# Altium PCB Pedal_Power.PcbDoc
Units mm, origin at the board's own origin, x right, y up, seen from the top; angles counter-clockwise.
Board outline 100 x 88 mm, 2 copper layers (Top Layer, Bottom Layer); 6 components, 2 nets, 26 pads, 0 vias.
Unrouted connection lines stored in the file: 23.
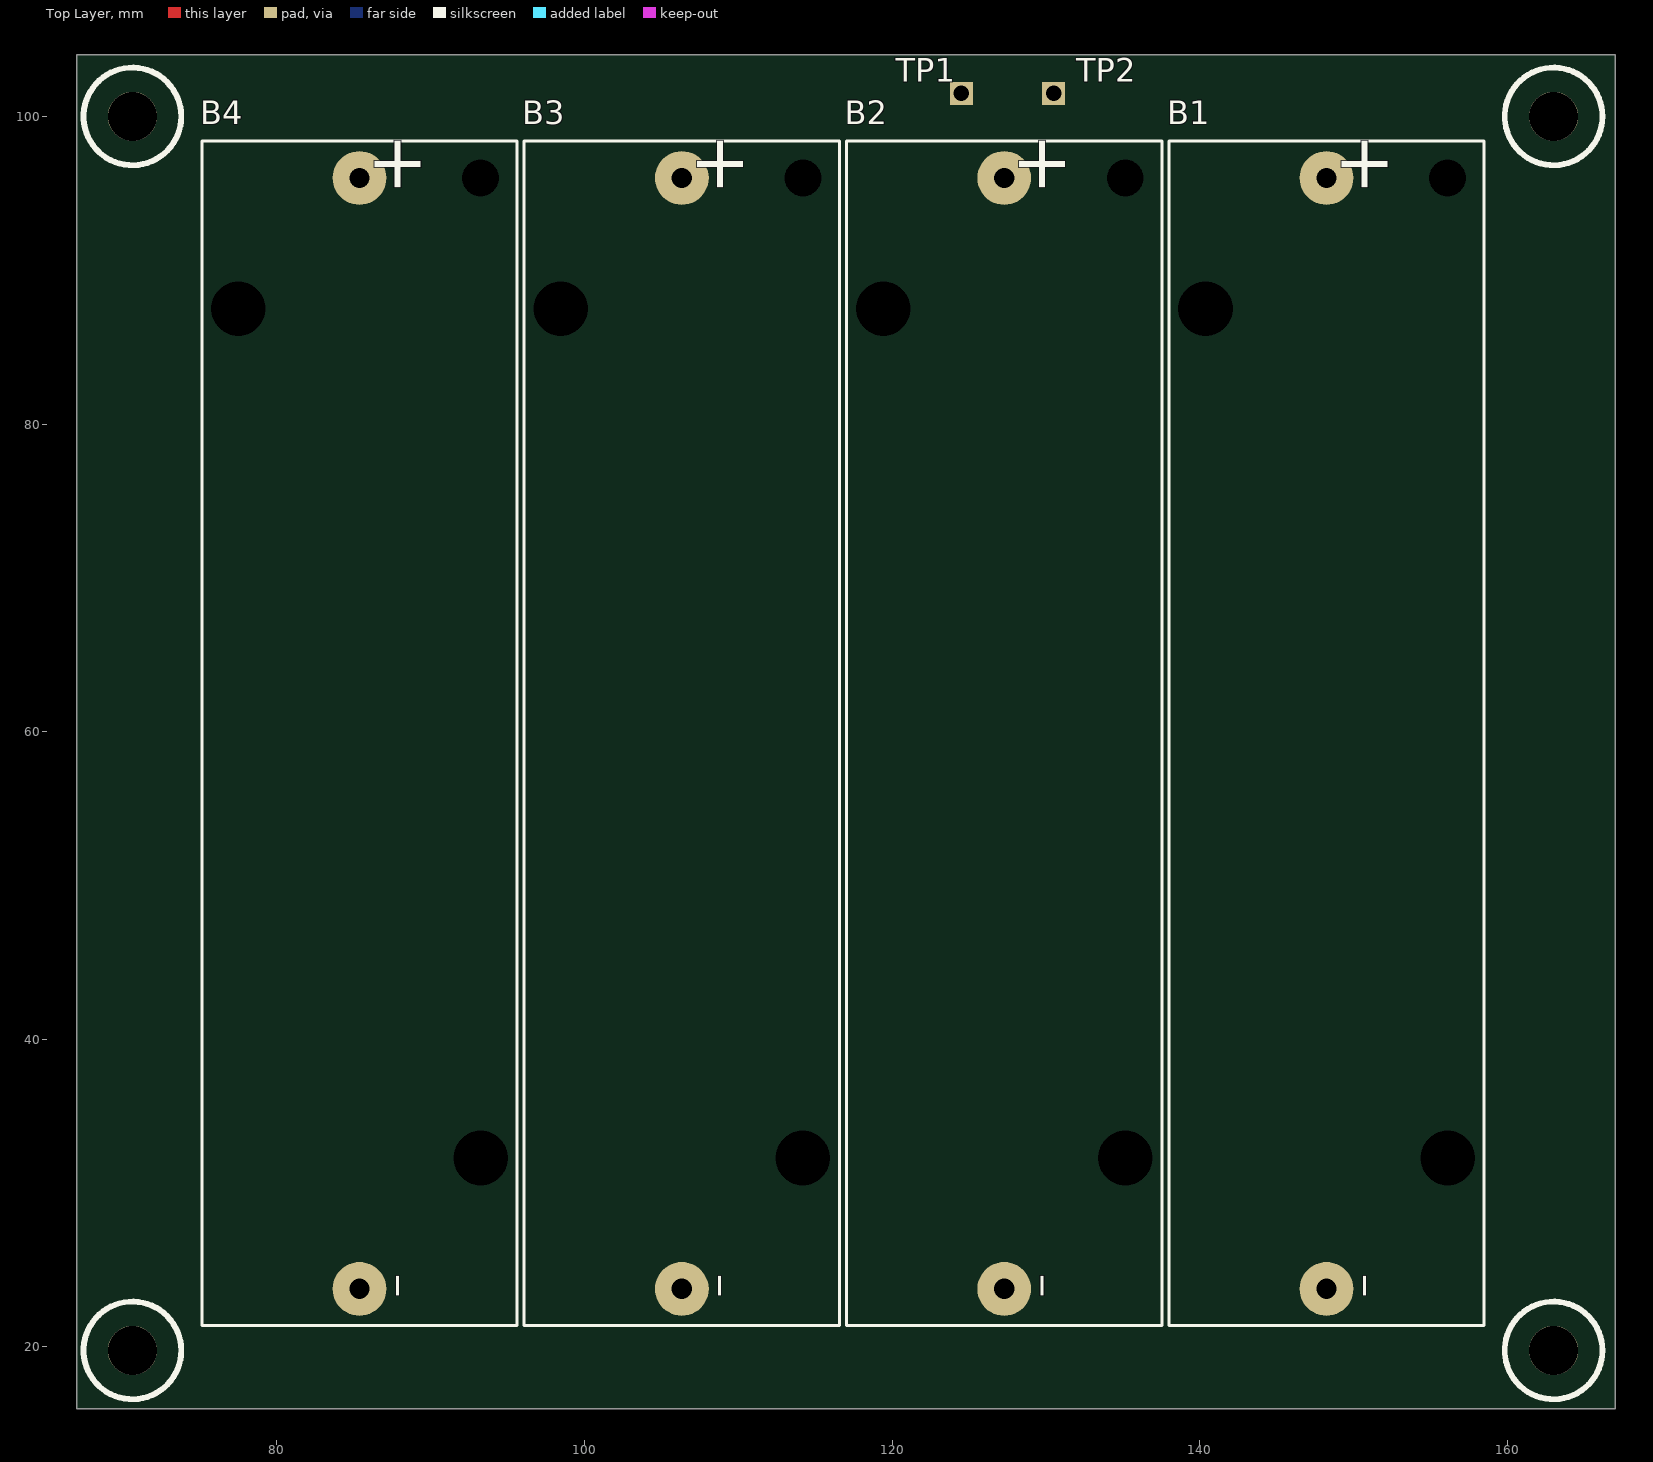
[diagram p0: Top Layer view]
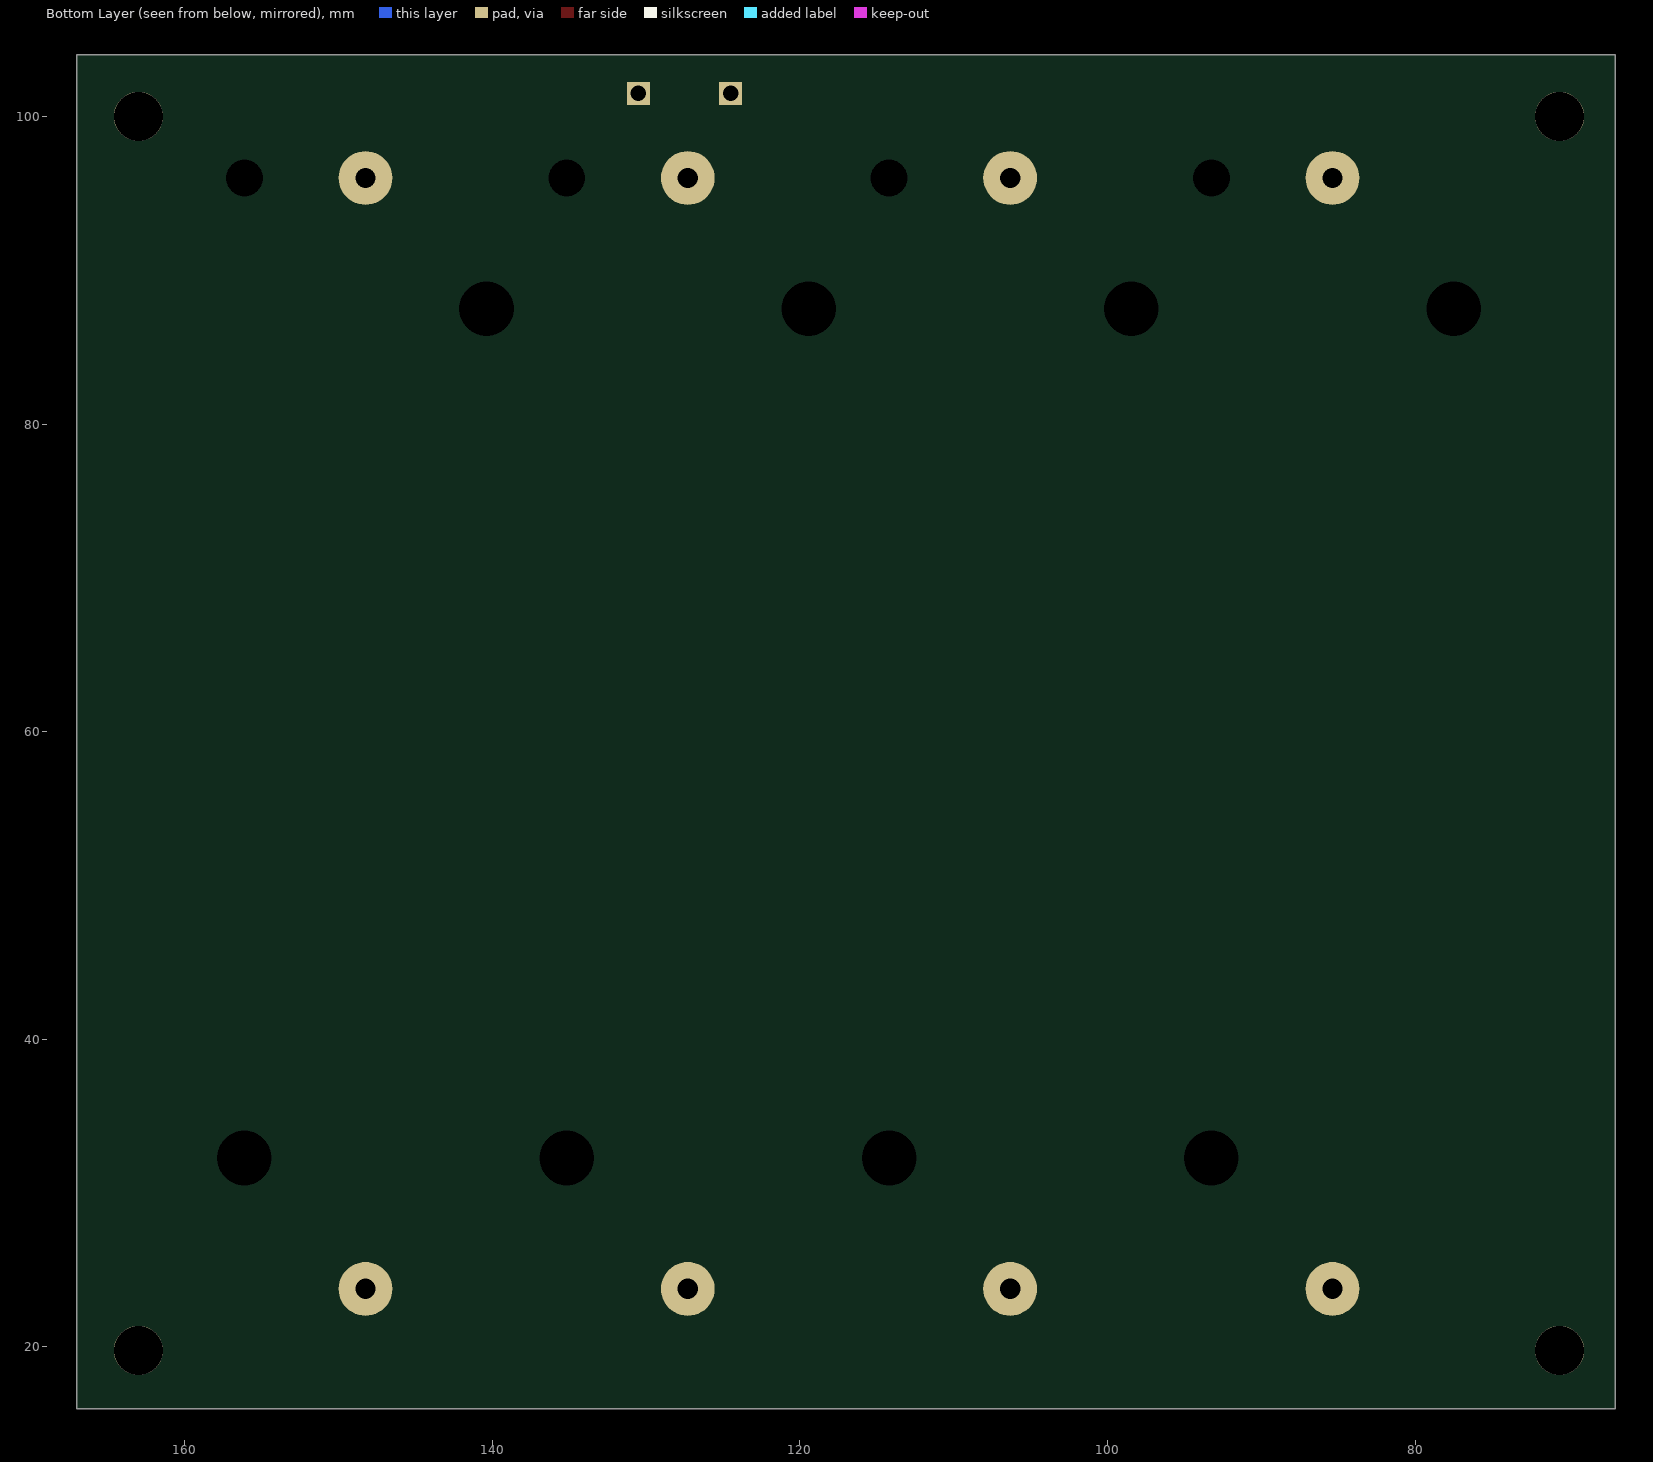
[diagram p1: Bottom Layer view, seen from below]

## Layer stack, top to bottom
Top Solder: solder mask 0.0102, Solder Resist, Dk 3.5
Top Layer: signal copper 0.0356
Dielectric 1: dielectric 0.32, FR-4, Dk 4.8
Bottom Layer: signal copper 0.0356
Bottom Solder: solder mask 0.0102, Solder Resist, Dk 3.5

## Board outline
67,16 67,104 167,104 167,16

## Design rules (kind name [scope] priority, off if disabled: settings)
Clearance [All] p1: gap=0.203 ignorepadtopadclearanceinfootprint=FALSE
PolygonConnect PolygonConnect_5 [All vs IsNamedPolygon('NONET_L01_P-001')] p1: thpad.connectstyle=Relief thpad.reliefconductorwidth=0.254 thpad.reliefentries=4 thpad.polygonreliefangle="90 Angle" thpad.airgapwidth=0.254 smdpad.connectstyle=Relief smdpad.reliefconductorwidth=0.254 smdpad.reliefentries=4 smdpad.polygonreliefangle="90 Angle" smdpad.airgapwidth=0.254 via.connectstyle=Direct via.reliefconductorwidth=0.254 via.reliefentries=4 via.polygonreliefangle="90 Angle" via.airgapwidth=0.254
PolygonConnect PolygonConnect_4 [All vs IsNamedPolygon('NONET_L01_P-001')] p2: thpad.connectstyle=Relief thpad.reliefconductorwidth=0.254 thpad.reliefentries=4 thpad.polygonreliefangle="90 Angle" thpad.airgapwidth=0.254 smdpad.connectstyle=Relief smdpad.reliefconductorwidth=0.254 smdpad.reliefentries=4 smdpad.polygonreliefangle="90 Angle" smdpad.airgapwidth=0.254 via.connectstyle=Direct via.reliefconductorwidth=0.254 via.reliefentries=4 via.polygonreliefangle="90 Angle" via.airgapwidth=0.254
PolygonConnect PolygonConnect_3 [All vs IsNamedPolygon('+5V_L01_P002')] p3: thpad.connectstyle=Relief thpad.reliefconductorwidth=0.254 thpad.reliefentries=4 thpad.polygonreliefangle="90 Angle" thpad.airgapwidth=0.254 smdpad.connectstyle=Relief smdpad.reliefconductorwidth=0.254 smdpad.reliefentries=4 smdpad.polygonreliefangle="90 Angle" smdpad.airgapwidth=0.254 via.connectstyle=Direct via.reliefconductorwidth=0.254 via.reliefentries=4 via.polygonreliefangle="90 Angle" via.airgapwidth=0.254
PolygonConnect PolygonConnect_2 [All vs IsNamedPolygon('NONET_L01_P-001')] p4: thpad.connectstyle=Relief thpad.reliefconductorwidth=0.254 thpad.reliefentries=4 thpad.polygonreliefangle="90 Angle" thpad.airgapwidth=0.254 smdpad.connectstyle=Relief smdpad.reliefconductorwidth=0.254 smdpad.reliefentries=4 smdpad.polygonreliefangle="90 Angle" smdpad.airgapwidth=0.254 via.connectstyle=Direct via.reliefconductorwidth=0.254 via.reliefentries=4 via.polygonreliefangle="90 Angle" via.airgapwidth=0.254
PolygonConnect PolygonConnect_1 [All vs IsNamedPolygon('+5V_L01_P002') Or IsNamedPolygon('+V_SYS_L01_P001') Or IsNamedPolygon('GND_L01_P006') Or IsNamedPolygon('NETD2_1_L01_P003')] p5: thpad.connectstyle=Relief thpad.reliefconductorwidth=0.254 thpad.reliefentries=4 thpad.polygonreliefangle="90 Angle" thpad.airgapwidth=0.254 smdpad.connectstyle=Direct smdpad.reliefconductorwidth=0.254 smdpad.reliefentries=4 smdpad.polygonreliefangle="90 Angle" smdpad.airgapwidth=0.254 via.connectstyle=Direct via.reliefconductorwidth=0.254 via.reliefentries=4 via.polygonreliefangle="90 Angle" via.airgapwidth=0.254
PolygonConnect [All] p6: connectstyle=Relief reliefconductorwidth=0.254 reliefentries=4 polygonreliefangle="90 Angle" airgapwidth=0.254
RoutingVias [All] p1: holewidth=0.3 width=0.7 viastyle="Through Hole" minholewidth=0.3 minwidth=0.7 maxholewidth=0.3 maxwidth=0.7
SolderMaskExpansion [All] p1: expansion=0.102 istentingtop=FALSE
Width [All] p1: maxlimit=1.016 minlimit=0.203 preferedwidth=0.254
30 further rules are at their usual default settings.

## Components (designator, comment, footprint, x,y, rotation, side; value= is the part's Value field where it differs from the comment)
B1 "1043" "KEYSTONE 1043" 148.238,59.889 r90 top
B2 "1043" "KEYSTONE 1043" 127.283,59.889 r90 top
B3 "1043" "KEYSTONE 1043" 106.328,59.889 r90 top
B4 "1043" "KEYSTONE 1043" 85.373,59.889 r90 top
TP1 "BAT+" TESTPOINT_PAD 124.5,101.5 r180 top
TP2 "BAT-" TESTPOINT_PAD 130.5,101.5 r270 top

## Footprints (in the part's own frame and the unit in brackets; to place one, negate y for a bottom-side part, rotate by r counter-clockwise, add the part's x,y. Pads: shape width x height; smd on the part's side, far side on the other; paste and mask are expansions set on the pad)
"KEYSTONE 1043" [mm]
  round 3.5 hole 1.32 unplated: 1(36.11,0) 2(-36.11,0)
  rect 0x0 hole 3.55 unplated: M(-27.6,-7.87) M(27.6,7.87)
  rect 0x0 hole 2.39 unplated: M(36.11,-7.87)
  silkscreen extent -38.5,-10.25 38.5,10.25, body extent -38.53,-10.32 38.53,10.33, height 14.86
TESTPOINT_PAD [mm]
  rect 1.5x1.5 hole 1: 1(0,0)

## Part data
B1 B2 B3 B4: "BATTERY HOLDER 18650 PC PIN", Manufacturer="Keystone Electronics", Operating Temperature="-50°C ~ 145°C", Supplier Part Number 1=36-1043-ND, Battery Cell Size=18650, Battery Type, Function="Cylindrical, Holder", ComponentLink1Description=Datasheet, ComponentLink1URL=http://keyelco.com/userAssets/file/M65p27.pdf, ComponentLink2Description="DigiKey Link", ComponentLink2URL=http://digikey.com/product-detail/en/keystone-electronics/1043/36-1043-ND/2745669, Height Above Board="0.585\" (14.86mm)", LastUpdated="2/2/2020 9:19:56 AM", Lifecycle Status=Active, Minimum Order=1, Mounting Type="PCB, Through Hole", Number of Cells=1, Packaging=Unknown, Part Number=1043, Part Status=Active, PartId=2, Price=2.58, Series=-, Style="Holder (Open)", Supplier 1=DigiKey, Termination Style="PC Pin"
TP1 TP2: library part TestPoint

## Free pads (board coordinates)
  round 3.2 hole 3.2 unplated: 0(70.61,19.778) 0(70.61,100) 0(163,100) 0(163,19.778)

## Nets (pads, with @x,y where several pads share a name; then routed paths per layer and width w, separated by ;. In a path a pad name is that pad's centre, name@x,y a point inside that pad or via, vN(x,y) a via of type N, cw(c..) or ccw(c..) an arc to the next point about the centre after c; other vN are vias at no path point)
GND: B1.2 B2.2 B3.2 B4.2 TP2.1
V_BAT: B1.1 B2.1 B3.1 B4.1 TP1.1
pads on no net: B1.M B2.M B3.M B4.M

## Silkscreen, mask and mechanical layers (free items; w line width, h text height)
Top Overlay:
  circle w0.381: c163,19.778 r3.175
  circle w0.381: c70.61,19.778 r3.175
  circle w0.381: c70.61,100 r3.175
  circle w0.381: c163,100 r3.175
outline:
  the board outline again, w0.127

## Text inside footprints (layer, text, board x,y; h text height)
B1: Top Overlay "-" at 153.088,23.089 h6 r90; Top Overlay "+" at 153.388,94.889 h6 r90
B2: Top Overlay "-" at 132.133,23.089 h6 r90; Top Overlay "+" at 132.433,94.889 h6 r90
B3: Top Overlay "-" at 111.178,23.089 h6 r90; Top Overlay "+" at 111.478,94.889 h6 r90
B4: Top Overlay "-" at 90.223,23.089 h6 r90; Top Overlay "+" at 90.523,94.889 h6 r90